# EAGLE board gvs1 (EAGLE 6.4)
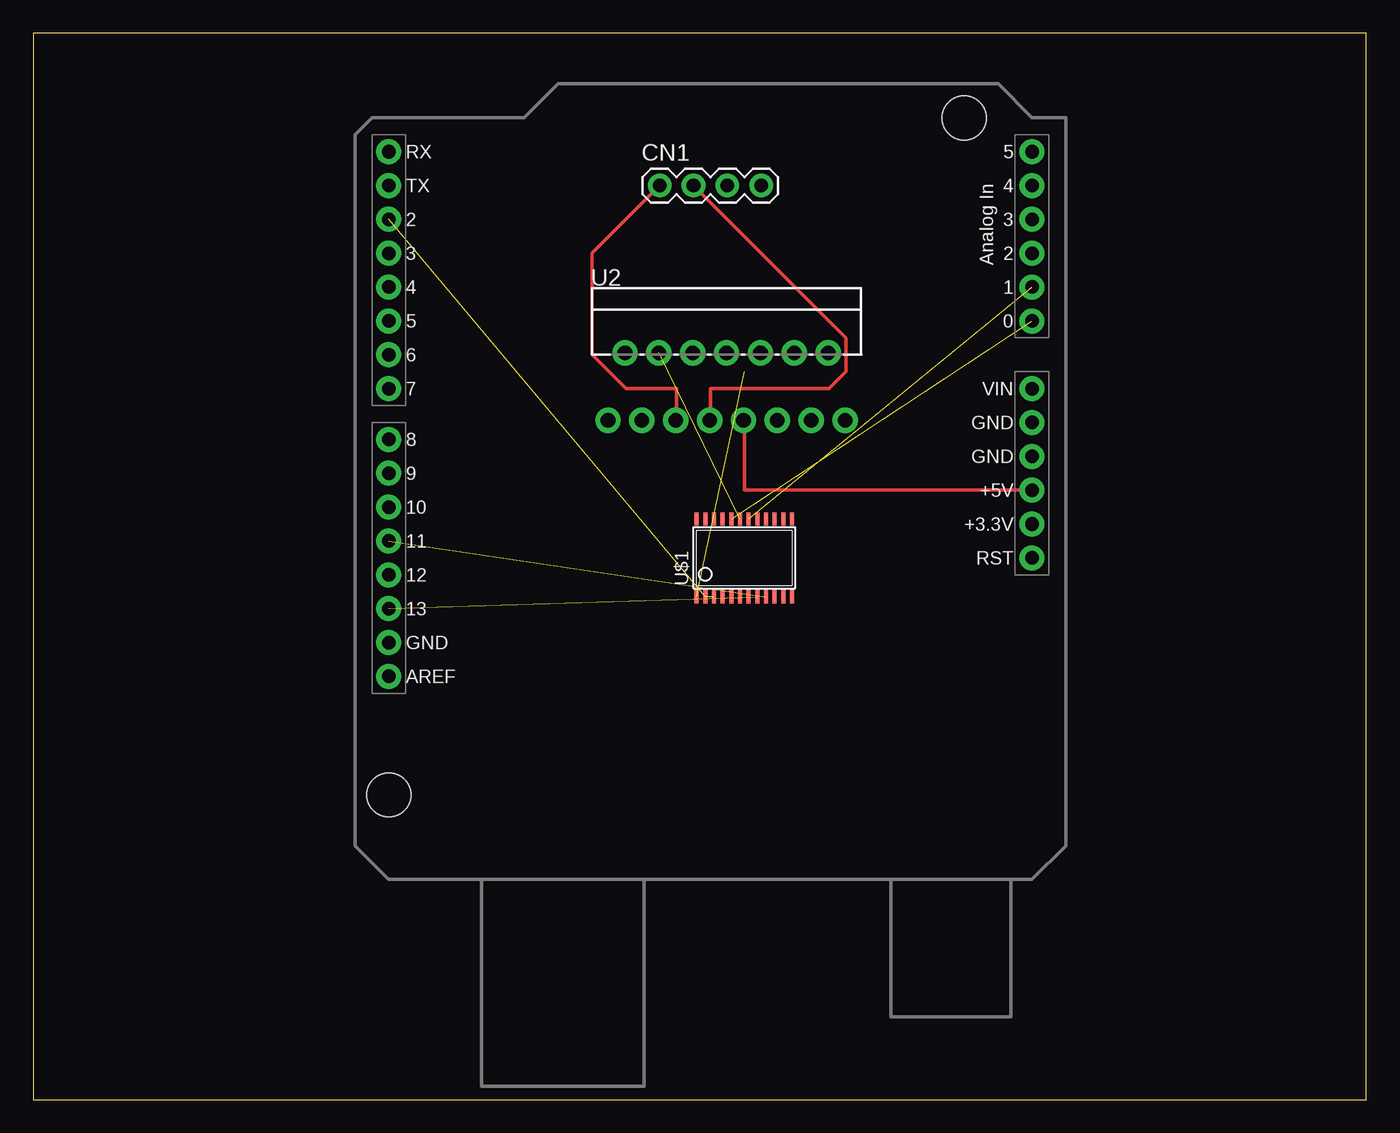
[diagram p0: board, top side]
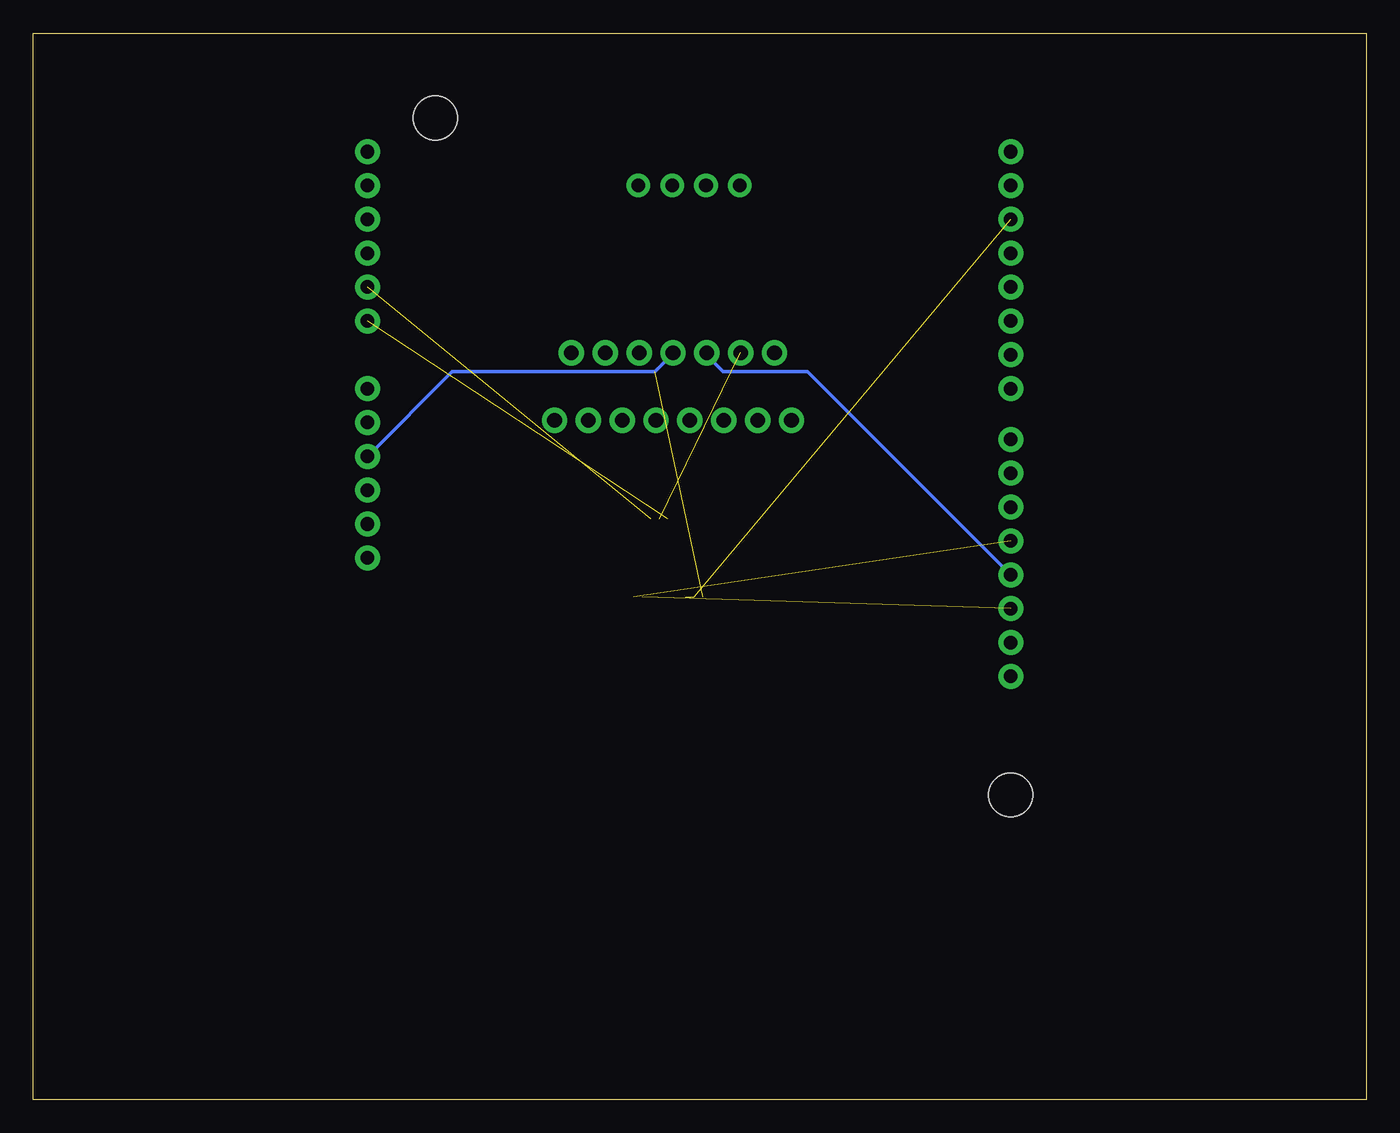
[diagram p1: board, bottom side, seen from below]

Size 100 x 80 mm. Coordinates in mm from the lower left corner, seen from the top.
Outline: 0,0 100,0 100,80 0,80 0,0
Copper layers (1*16): Top 0.035mm / dielectric 1.5mm / Bottom 0.035mm
Design rules "default": minimum track width 10mil, minimum drill 24mil, track to track 8mil, track to pad 8mil, pad to pad 8mil, via to via 8mil, smd to smd 8mil, copper to edge 40mil, drill to drill 8mil, minimum pad ring 10mil, minimum via ring 8mil, stop-mask expansion 4mil, vias tented up to drill 0mil, thermal gap 10mil

## Footprints (pad centres in the part's own frame; a part is rotated, then mirrored left to right if it is on the bottom)
1X04-BIG = drill 1.016 pad 1.778: 1 0,0; 2 2.54,0; 3 5.08,0; 4 7.62,0
DUEMILANOVE_SHIELD = drill 1.016 pad 1.88: 3.3V 50.8,26.67; 5V 50.8,29.21; A0 50.8,41.91; A1 50.8,44.45; A2 50.8,46.99; A3 50.8,49.53; A4 50.8,52.07; A5 50.8,54.61; AREF 2.54,15.24; D2 2.54,49.53; D3 2.54,46.99; D4 2.54,44.45; D5 2.54,41.91; D6 2.54,39.37; D7 2.54,36.83; D8 2.54,33.02; D9 2.54,30.48; D10 2.54,27.94; D11 2.54,25.4; D12 2.54,22.86; D13 2.54,20.32; GND@0 50.8,31.75; GND@1 50.8,34.29; GND@2 2.54,17.78; RES 50.8,24.13; RX 2.54,54.61; TX 2.54,52.07; VIN 50.8,36.83 | hole 3.302: 45.72,57.15; 2.54,6.35
MULTIWATT15 = drill 1.1 pad 1.9: 1 -8.95,-2.39; 2 -7.68,2.69; 3 -6.41,-2.39; 4 -5.14,2.69; 5 -3.87,-2.39; 6 -2.6,2.69; 7 -1.33,-2.39; 8 -0.06,2.69; 9 1.21,-2.39; 10 2.48,2.69; 11 3.75,-2.39; 12 5.02,2.69; 13 6.29,-2.39; 14 7.56,2.69; 15 8.83,-2.39
TSSOP24 = smd 0.305 x 0.991: 1 -3.575,-2.918; 2 -2.925,-2.918; 3 -2.275,-2.918; 4 -1.625,-2.918; 5 -0.975,-2.918; 6 -0.325,-2.918; 7 0.325,-2.918; 8 0.975,-2.918; 9 1.625,-2.918; 10 2.275,-2.918; 11 2.925,-2.918; 12 3.575,-2.918; 13 3.575,2.918; 14 2.925,2.918; 15 2.275,2.918; 16 1.625,2.918; 17 0.975,2.918; 18 0.325,2.918; 19 -0.325,2.918; 20 -0.975,2.918; 21 -1.625,2.918; 22 -2.275,2.918; 23 -2.925,2.918; 24 -3.575,2.918

## Placement (x,y rotation side)
CN1  1X4-BIG  [1X04-BIG]  46.99,68.58 0 top
U1  ARDUINO_SHIELDLABEL  [DUEMILANOVE_SHIELD]  24.13,16.51 0 top
U2  L298  [MULTIWATT15]  52.07,53.34 0 top
U$1  AD5410  [TSSOP24]  53.34,40.64 0 top

## Library data of the parts
CN1 = adafruit
U1 = SparkFun-Boards
U2 = SparkFun-PowerIC
U$1 = custom_components

## Nets
+5V: U1.5V U2.9
+24V: U$1.24
EAR1: CN1.1 U2.5
EAR2: CN1.2 U2.7
GND: U1.GND@0 U2.8 U$1.1
N$1: U1.D11 U$1.9
N$2: U1.D13 U$1.8
N$3: U2.4 U$1.19
N$4: U1.D12 U2.6
N$5: U1.A0 U$1.20
N$6: U1.D2 U$1.2 U$1.3
N$7: U1.A1 U$1.18

## Tracks (layer width: path | path; a pad name or v marks a point on that pad's centre or on a via)
+5V
  Top 0.254: U1.5V 53.34,45.72 53.34,50.8 U2.9
EAR1
  Top 0.254: CN1.1 41.91,63.5 41.91,55.88 44.45,53.34 48.26,53.34 48.26,50.8 U2.5
EAR2
  Top 0.254: CN1.2 60.96,57.15 60.96,54.61 59.69,53.34 50.8,53.34 50.8,50.8 U2.7
GND  (1 unrouted)
  Bottom 0.254: U1.GND@0 68.58,54.61 53.34,54.61 52.07,55.88 U2.8
N$1  (1 unrouted)
N$2  (1 unrouted)
N$3  (1 unrouted)
N$4
  Bottom 0.254: U1.D12 41.91,54.61 48.26,54.61 49.53,55.88 U2.6
N$5  (1 unrouted)
N$6  (2 unrouted)
N$7  (1 unrouted)